# EAGLE board RatGDO (EAGLE 9.6.2)
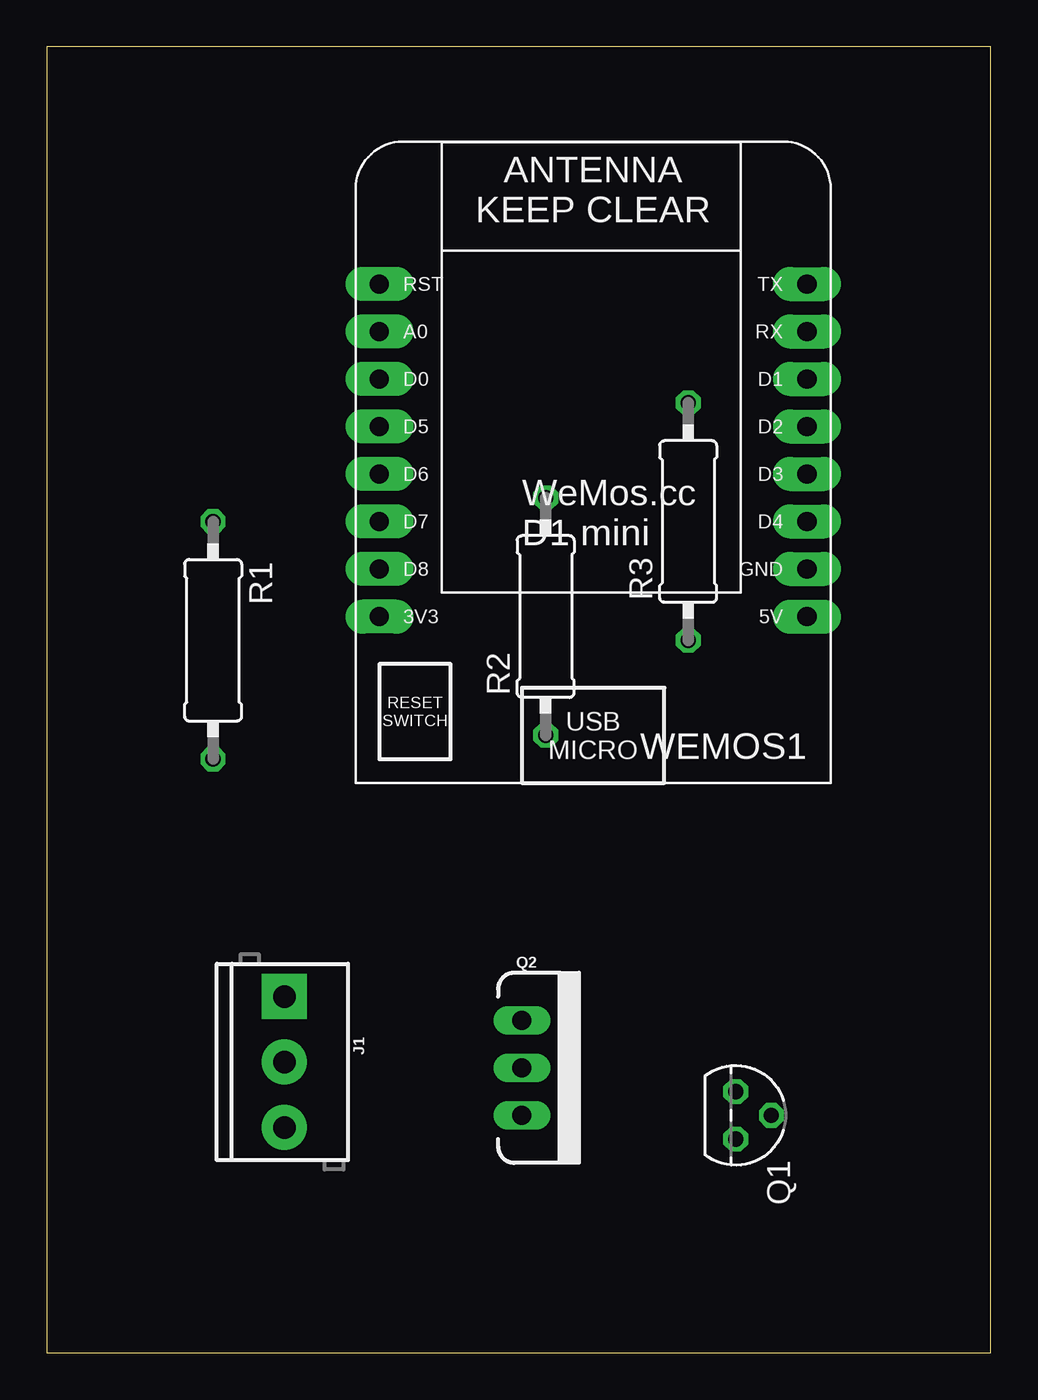
[diagram p0: board, top side]
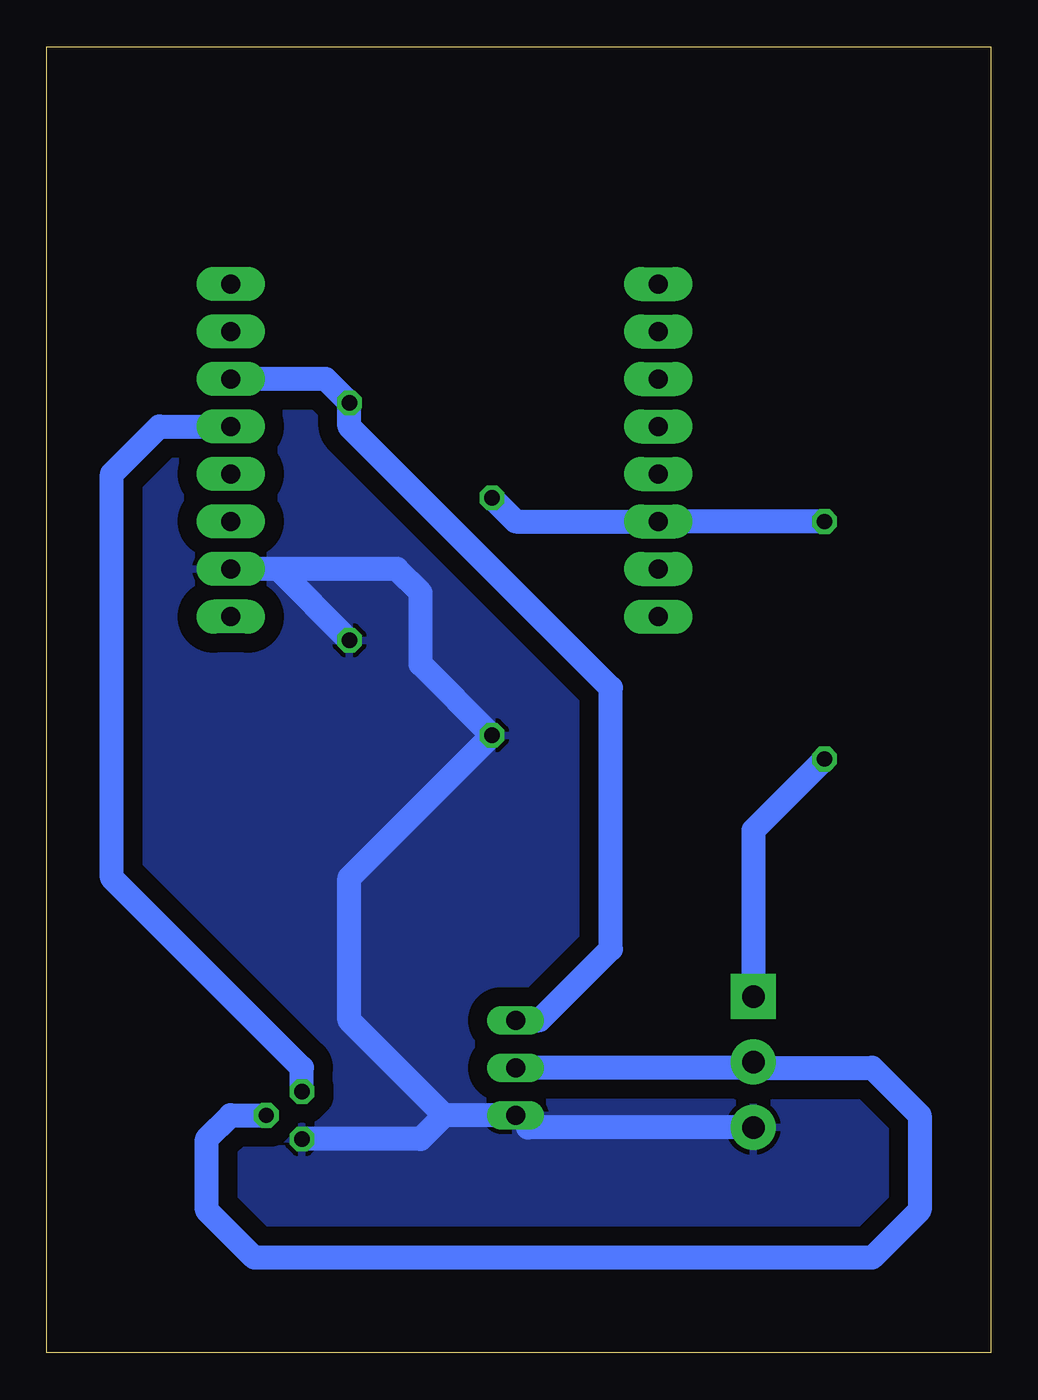
[diagram p1: board, bottom side, seen from below]

Size 50.47 x 69.84 mm. Coordinates in mm from the lower left corner, seen from the top.
Outline: 0,0 50.47,0 50.47,69.84 0,69.84 0,0
Copper layers (1*16): Top 0.035mm / dielectric 1.5mm / Bottom 0.035mm
Design rules "default": minimum track width 6mil, minimum drill 0.35mm, track to track 6mil, track to pad 6mil, pad to pad 6mil, via to via 6mil, smd to smd 6mil, copper to edge 40mil, drill to drill 6mil, minimum pad ring 10mil, minimum via ring 8mil, stop-mask expansion 4mil, vias tented up to drill 0mil, thermal gap 10mil

## Footprints (pad centres in the part's own frame; a part is rotated, then mirrored left to right if it is on the bottom)
SCREWTERMINAL-3.5MM-3 = drill 1.2 pad 2.413 square: 1 0,0 | drill 1.2 pad 2.413: 2 3.5,0; 3 7,0
TO92 = drill 0.813 octagon: 1 -1.27,0; 2 0,1.905; 3 1.27,0
TO220V = drill 1.016 long: 1 -2.54,0; 2 0,0; 3 2.54,0
0309/12 = drill 0.813 octagon: 1 -6.35,0; 2 6.35,0
WEMOS-D1-MINI = drill 1.016 pad 1.829 long: 3V3 -10.16,-10.16; 5V 12.7,-10.16; A0 -10.16,5.08; D0 -10.16,2.54; D1 12.7,2.54; D2 12.7,0; D3 12.7,-2.54; D4 12.7,-5.08; D5 -10.16,0; D6 -10.16,-2.54; D7 -10.16,-5.08; D8 -10.16,-7.62; GND 12.7,-7.62; RESET -10.16,7.62; RX 12.7,5.08; TX 12.7,7.62

## Placement (x,y rotation side)
J1  3-pin Screw  [SCREWTERMINAL-3.5MM-3]  12.7,19.05 270 top
Q1  NMOSFET  [TO92]  36.83,12.7 270 top
Q2  60V/32A/35mΩ  [TO220V]  25.4,15.24 270 top
R1  10K Ohm  [0309/12]  8.89,38.1 270 top
R2  10K Ohm  [0309/12]  26.67,39.37 90 top
R3  10 K Ohm  [0309/12]  34.29,44.45 90 top
WEMOS1  [WEMOS-D1-MINI]  27.94,49.53 0 top

## Library data of the parts
J1 = SparkFun-Connectors; PROD_ID: CONN-08288; SF_ID: PRT-08235
Q1 = Transistor; CATEGORY: Transistor; SUB-CATEGORY: MOSFET; TYPE: N-Channel
Q2 = SparkFun-DiscreteSemi; PROD_ID: TRANS-10060
R1-R3 = rcl; SPICEPREFIX: R
WEMOS1 = esp8266modules

## Nets
5V: WEMOS1.5V
D1: Q2.1 R3.2 WEMOS1.D1
D2: Q1.1 WEMOS1.D2
D7: R1.1 R2.2 WEMOS1.D7
GND: J1.3 Q1.3 Q2.3 R2.1 R3.1 WEMOS1.GND
PIN1: J1.1 R1.2
PIN2: J1.2 Q1.2 Q2.2

## Tracks (layer width: path | path; a pad name or v marks a point on that pad's centre or on a via)
D1
  Bottom 1.27: WEMOS1.D1 35.56,52.07 R3.2 34.29,49.53 20.32,35.56 20.32,21.59 24.13,17.78 Q2.1
D2
  Bottom 1.27: WEMOS1.D2 44.45,49.53 46.99,46.99 46.99,25.4 36.83,15.24 Q1.1
D7
  Bottom 1.27: R1.1 WEMOS1.D7 25.4,44.45 R2.2
GND
  Bottom 0.61: 24.75,12.05 Q2.3
  Bottom 1.27: J1.3 24.75,12.05 | Q2.3 29.21,12.7 | 29.21,12.7 34.29,17.78 34.29,25.4 R2.1 30.48,36.83 30.48,40.64 31.75,41.91 WEMOS1.GND 38.1,41.91 R3.1 | 29.21,12.7 30.48,11.43 Q1.3
  pour Bottom (isolate 1.016): 0,69.85 0,0 50.8,0 50.8,69.85
PIN1
  Bottom 1.27: R1.2 12.7,27.94 J1.1
PIN2
  Bottom 0.61: 13.01,15.24 J1.2 12.39,15.24
  Bottom 1.27: 13.01,15.24 Q2.2 | 12.39,15.24 6.35,15.24 3.81,12.7 3.81,7.62 6.35,5.08 39.37,5.08 41.91,7.62 41.91,11.43 40.64,12.7 Q1.2